# EAGLE board 8_Channel_Current_Sensor (EAGLE 8.7.0)
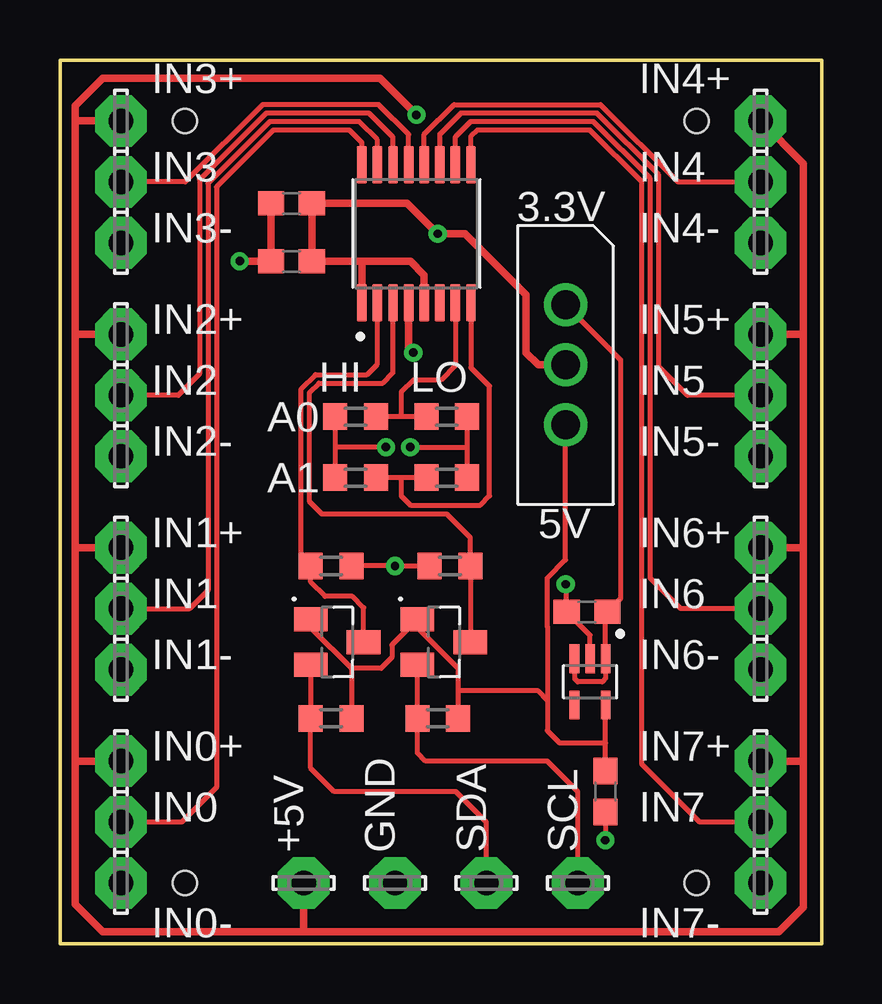
[diagram p0: board, top side]
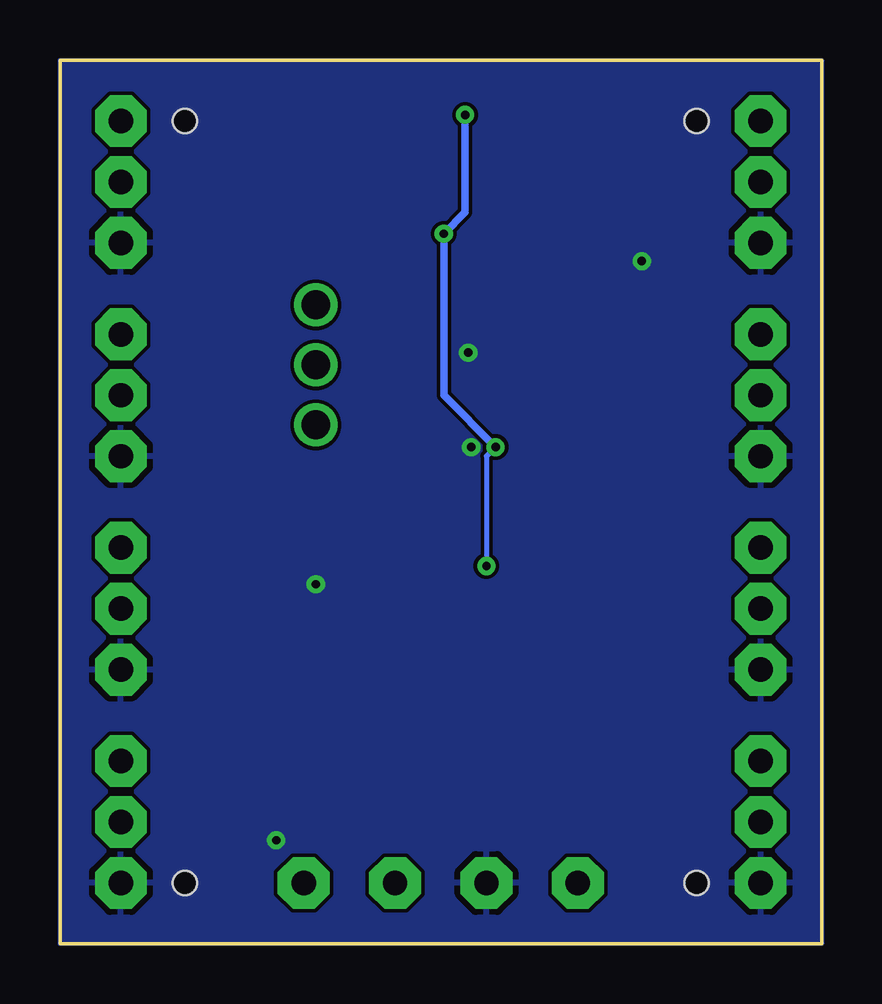
[diagram p1: board, bottom side, seen from below]

Size 31.75 x 36.83 mm. Coordinates in mm from the lower left corner, seen from the top.
Outline: 0,0 0,36.83 31.75,36.83 31.75,0 0,0
Copper layers (1*16): Top 0.035mm / dielectric 1.5mm / Bottom 0.035mm
Design rules "default *": minimum track width 6mil, minimum drill 0.35mm, track to track 6mil, track to pad 6mil, pad to pad 6mil, via to via 6mil, smd to smd 6mil, copper to edge 0mil, drill to drill 6mil, minimum pad ring 10mil, minimum via ring 8mil, stop-mask expansion 4mil, vias tented up to drill 0mil, thermal gap 10mil
Holes 1 mm at 5.21,2.54 26.54,2.54 5.21,34.29 26.54,34.29

## Footprints (pad centres in the part's own frame; a part is rotated, then mirrored left to right if it is on the bottom)
LSP10 = drill 1.016 pad 2.159 octagon: MP 0,0
SOP65P640X120-16N = smd 1.57 x 0.41: 1 -2.87,2.275; 2 -2.87,1.625; 3 -2.87,0.975; 4 -2.87,0.325; 5 -2.87,-0.325; 6 -2.87,-0.975; 7 -2.87,-1.625; 8 -2.87,-2.275; 9 2.87,-2.275; 10 2.87,-1.625; 11 2.87,-0.975; 12 2.87,-0.325; 13 2.87,0.325; 14 2.87,0.975; 15 2.87,1.625; 16 2.87,2.275
C0603 = smd 1.1 x 1: 1 -0.85,0; 2 0.85,0
SOT95P240X120-3N = smd 1 x 1.4: 1 -0.95,-1.1; 2 0.95,-1.1; 3 0,1.1
R0603 = smd 1 x 1.1: 1 -0.85,0; 2 0.85,0
SOT65P210X110-5N = smd 0.4 x 1.19: 1 -0.65,-0.96; 2 0,-0.96; 3 0.65,-0.96; 4 0.65,0.96; 5 -0.65,0.96
SW3-2.5-11.6X4.0X5.4+2.0MM = drill 1.2: 1 -2.5,0; 2 0,0; 3 2.5,0

## Placement (x,y rotation side)
+5V  LSP10  [LSP10]  10.16,2.54 0 top
ADC  ADC128D818CIMT/NOPB  [SOP65P640X120-16N]  14.86,29.59 90 top
C1  .1uF  [C0603]  9.65,30.86 180 top
C2  1uF  [C0603]  9.65,28.45 180 top
C3  1uF  [C0603]  22.73,6.35 270 top
C5  1uF  [C0603]  21.97,13.84 180 top
GND  LSP10  [LSP10]  13.97,2.54 0 top
IN0  LSP10  [LSP10]  2.54,5.08 90 top
IN0+  LSP10  [LSP10]  2.54,7.62 90 top
IN0-  LSP10  [LSP10]  2.54,2.54 90 top
IN1  LSP10  [LSP10]  2.54,13.97 90 top
IN1+  LSP10  [LSP10]  2.54,16.51 90 top
IN1-  LSP10  [LSP10]  2.54,11.43 90 top
IN2  LSP10  [LSP10]  2.54,22.86 90 top
IN2+  LSP10  [LSP10]  2.54,25.4 90 top
IN2-  LSP10  [LSP10]  2.54,20.32 90 top
IN3  LSP10  [LSP10]  2.54,31.75 90 top
IN3+  LSP10  [LSP10]  2.54,34.29 90 top
IN3-  LSP10  [LSP10]  2.54,29.21 90 top
IN4  LSP10  [LSP10]  29.21,31.75 270 top
IN4+  LSP10  [LSP10]  29.21,34.29 270 top
IN4-  LSP10  [LSP10]  29.21,29.21 270 top
IN5  LSP10  [LSP10]  29.21,22.86 270 top
IN5+  LSP10  [LSP10]  29.21,25.4 270 top
IN5-  LSP10  [LSP10]  29.21,20.32 270 top
IN6  LSP10  [LSP10]  29.21,13.97 270 top
IN6+  LSP10  [LSP10]  29.21,16.51 270 top
IN6-  LSP10  [LSP10]  29.21,11.43 270 top
IN7  LSP10  [LSP10]  29.21,5.08 270 top
IN7+  LSP10  [LSP10]  29.21,7.62 270 top
IN7-  LSP10  [LSP10]  29.21,2.54 270 top
Q1  BSS138  [SOT95P240X120-3N]  16,12.57 270 top
Q2  BSS138  [SOT95P240X120-3N]  11.56,12.57 270 top
R1  10k  [R0603]  12.32,21.97 180 top
R2  10k  [R0603]  16.13,21.97 180 top
R3  10k  [R0603]  12.32,19.43 180 top
R4  10k  [R0603]  16.13,19.43 180 top
R5  10k  [R0603]  15.75,9.4 0 top
R6  10k  [R0603]  11.3,9.4 0 top
R7  10k  [R0603]  16.26,15.75 0 top
R8  10k  [R0603]  11.3,15.75 180 top
REG  LD59015C33R  [SOT65P210X110-5N]  22.1,10.92 180 top
SCL  LSP10  [LSP10]  21.59,2.54 0 top
SDA  LSP10  [LSP10]  17.78,2.54 0 top
SW1  DIP-SLIDE-SWITCH-EG1218  [SW3-2.5-11.6X4.0X5.4+2.0MM]  21.08,24.13 270 top

## Library data of the parts
+5V GND IN0 IN0+ IN0- IN1 IN1+ IN1- IN2 IN2+ IN2- IN3 IN3+ IN3- IN4 IN4+ IN4- IN5 IN5+ IN5- IN6 IN6+ IN6- IN7 IN7+ IN7- SCL SDA = solpad
ADC = ADC128D818CIMT_NOPB; AVAILABILITY: Good; DESCRIPTION: 12-Bit, 8-Channel, ADC System Monitor w/ Temp Sensor, Internal/External Reference, & I2C Interface 16-TSSOP -40 to 125; MF: Texas Instruments; MP: ADC128D818CIMT/NOPB; PACKAGE: TSSOP-16 Texas Instruments; PRICE: 3.94 USD
C1-C3 C5 R1-R8 = resistor
Q1 Q2 = BSS138; AVAILABILITY: Good; DESCRIPTION: 50V N-Channel Logic Level Enhancement Mode Field Effect Transistor; MF: ON Semiconductor; MP: BSS138; PACKAGE: SOT-23 ON Semiconductor; PRICE: 0.09 USD
REG = LD59015C33R; AVAILABILITY: Good; DESCRIPTION: LD59015 Series 150 mA 3.3 V Fixed High PSRR LDO Voltage Regulator - SOT-323-5; MF: STMicroelectronics; MP: LD59015C33R; PACKAGE: SOT-323 STMicroelectronics; PRICE: 0.44 USD
SW1 = EG1218-DIP-SLIDE-SWITCH; AVAILABILITY: Good; DESCRIPTION: EG Series SPDT On-On Vertical Through Hole Slide Switch; MF: E-Switch; MP: EG1218; PACKAGE: FakePackage u; PRICE: 0.41 USD

## Nets
+5V: +5V.MP ADC.1 ADC.5 C1.1 C2.1 IN0+.MP IN1+.MP IN2+.MP IN3+.MP IN4+.MP IN5+.MP IN6+.MP IN7+.MP R1.2 R3.2 R7.1 R8.1 SW1.2
+5V-S: C5.1 REG.1 REG.3 SW1.1
A0: ADC.7 R1.1 R2.2
A1: ADC.8 R3.1 R4.2
GND: ADC.4 C1.2 C2.2 C3.2 C5.2 GND.MP IN0-.MP IN1-.MP IN2-.MP IN3-.MP IN4-.MP IN5-.MP IN6-.MP IN7-.MP R2.1 R4.1 REG.2
IN0: ADC.16 IN0.MP
IN1: ADC.15 IN1.MP
IN2: ADC.14 IN2.MP
IN3: ADC.13 IN3.MP
IN4: ADC.12 IN4.MP
IN5: ADC.11 IN5.MP
IN6: ADC.10 IN6.MP
IN7: ADC.9 IN7.MP
INT: ADC.6
NC: REG.4
SCL: Q1.2 R5.1 SCL.MP
SCL5: ADC.3 Q1.3 R7.2
SDA: Q2.2 R6.1 SDA.MP
SDA5: ADC.2 Q2.3 R8.2
V-PU: C3.1 Q1.1 Q2.1 R5.2 R6.2 REG.5 SW1.3

## Tracks (layer width: path | path; a pad name or v marks a point on that pad's centre or on a via)
+5V  (via drill 0.35)
  Top 0.203: R1.2 11.34,22.1 | R1.2 11.47,20.7 | 11.47,20.7 R3.2 | 11.47,22.39 R1.2 | v13.59,20.7 11.47,20.7 | R7.1 v13.97,15.75 R8.1
  Top 0.305: IN4+.MP 30.99,32.51 30.99,25.4 | 12.57,28.45 14.61,28.45 15.18,27.87 ADC.5 | 12.57,28.45 C2.1 C1.1 14.48,30.86 v15.75,29.59 16.89,29.59 19.43,27.05 19.43,24.64 19.94,24.13 SW1.2 | ADC.1 12.58,28.44 12.57,28.45 | v14.86,34.54 13.34,36.07 1.78,36.07 0.64,34.92 0.64,34.29 | 10.16,0.51 1.78,0.51 0.64,1.65 0.64,7.62 | 10.16,0.51 29.97,0.51 30.99,1.52 30.99,7.62 | +5V.MP 10.16,0.51 | 0.64,7.62 0.64,16.51 | 0.64,16.51 0.64,25.4 | 0.64,25.4 0.64,34.29 | IN0+.MP 0.64,7.62 | IN1+.MP 0.64,16.51 | IN2+.MP 0.64,25.4 | IN3+.MP 0.64,34.29 | 30.99,7.62 30.99,16.51 | 30.99,16.51 30.99,25.4 | IN7+.MP 30.99,7.62 | IN6+.MP 30.99,16.51 | IN5+.MP 30.99,25.4
  Bottom 0.203: v13.59,20.7 13.97,20.32 v13.97,15.75
  Bottom 0.305: v14.86,34.54 14.86,30.48 v15.75,29.59 15.75,22.86 v13.59,20.7
+5V-S
  Top 0.203: C5.1 22.75,13.77 REG.1 22.75,11.06 22.61,10.92 21.59,10.92 21.45,11.06 REG.3 | C5.1 22.86,13.88 | C5.1 23.37,14.39 23.37,24.34 SW1.1
A0
  Top 0.203: R2.2 14.22,21.97 | 14.22,21.97 R1.1 | 16.51,26.7 ADC.7 16.48,24.1 15.88,23.5 14.73,23.5 14.22,22.99 14.22,21.97
A1
  Top 0.203: R4.2 14.22,19.43 | 14.22,19.43 R3.1 | ADC.8 17.13,24.01 17.91,23.24 17.91,18.67 17.53,18.29 14.61,18.29 14.22,18.67 14.22,19.43
GND  (via drill 0.35)
  Top 0.203: C5.2 21.08,13.8 | REG.2 22.1,12.87 C5.2 | R2.1 16.98,20.7 | 16.98,20.7 R4.1 | C5.2 21.12,14.95 v21.08,14.99 | v14.61,20.7 16.98,20.7 | C3.2 v22.73,4.32
  Top 0.305: C1.2 C2.2 v7.49,28.45 | ADC.4 14.53,24.84 v14.73,24.64
  pour Bottom: 0,36.83 0,0 31.75,0 31.75,36.83
IN0
  Top 0.203: IN0.MP 5.08,5.08 6.53,6.53 6.53,31.55 8.89,33.91 12.06,33.91 12.58,33.39 ADC.16
IN1
  Top 0.203: IN1.MP 5.41,13.97 6.17,14.73 6.17,31.69 8.74,34.27 12.47,34.27 13.23,33.5 ADC.15
IN2
  Top 0.203: ADC.14 13.88,33.61 12.88,34.62 8.6,34.62 5.82,31.84 5.82,23.75 4.93,22.86 IN2.MP
IN3
  Top 0.203: ADC.13 14.53,33.73 13.28,34.98 8.45,34.98 5.22,31.75 IN3.MP
IN4
  Top 0.203: ADC.12 15.18,33.73 16.43,34.98 22.54,34.98 25.77,31.75 IN4.MP
IN5
  Top 0.203: IN5.MP 26.16,22.86 24.97,24.05 24.97,32.05 22.39,34.62 16.71,34.62 15.83,33.74 ADC.11
IN6
  Top 0.203: IN6.MP 25.88,13.97 24.61,15.24 24.61,31.9 22.25,34.27 17.12,34.27 16.48,33.63 ADC.10
IN7
  Top 0.203: IN7.MP 26.67,5.08 24.26,7.49 24.26,31.75 22.1,33.91 17.4,33.91 17.13,33.64 ADC.9
SCL
  Top 0.203: Q1.2 R5.1 14.9,7.96 15.24,7.62 20.32,7.62 21.59,6.35 SCL.MP
SCL5
  Top 0.203: Q1.3 R7.2 17.11,16.93 16.13,17.91 10.92,17.91 10.41,18.41 10.41,22.99 10.79,23.37 13.46,23.37 13.88,23.79 ADC.3
SDA
  Top 0.203: Q2.2 R6.1 10.45,7.33 11.43,6.35 16.51,6.35 17.78,5.08 SDA.MP
SDA5
  Top 0.203: Q2.3 12.66,14.01 12.19,14.48 11.05,14.48 10.45,15.07 R8.2 10.06,16.14 10.06,23.13 10.65,23.72 12.8,23.72 13.23,24.16 ADC.2
V-PU
  Top 0.203: 16.6,10.54 16.6,11.49 14.9,13.18 Q1.1 13.84,12.46 13.84,11.94 13.39,11.49 12.15,11.49 | 16.6,10.54 R5.2 16.51,9.31 | Q2.1 10.46,13.18 12.15,11.49 | 12.15,11.49 R6.2 | 20.32,10.16 20.32,13.23 20.32,13.24 20.32,15.24 21.08,16 SW1.3 | 20.32,10.16 20.32,8.89 20.83,8.38 22.75,8.38 | 20.32,10.16 19.94,10.54 16.6,10.54 | C3.1 22.75,7.21 22.75,8.38 | 22.75,8.38 REG.5

## Text on the board
tNames: 3.3V | HI | LO | A0 | A1 | 5V